# EAGLE board 5volt (EAGLE 9.6.2)
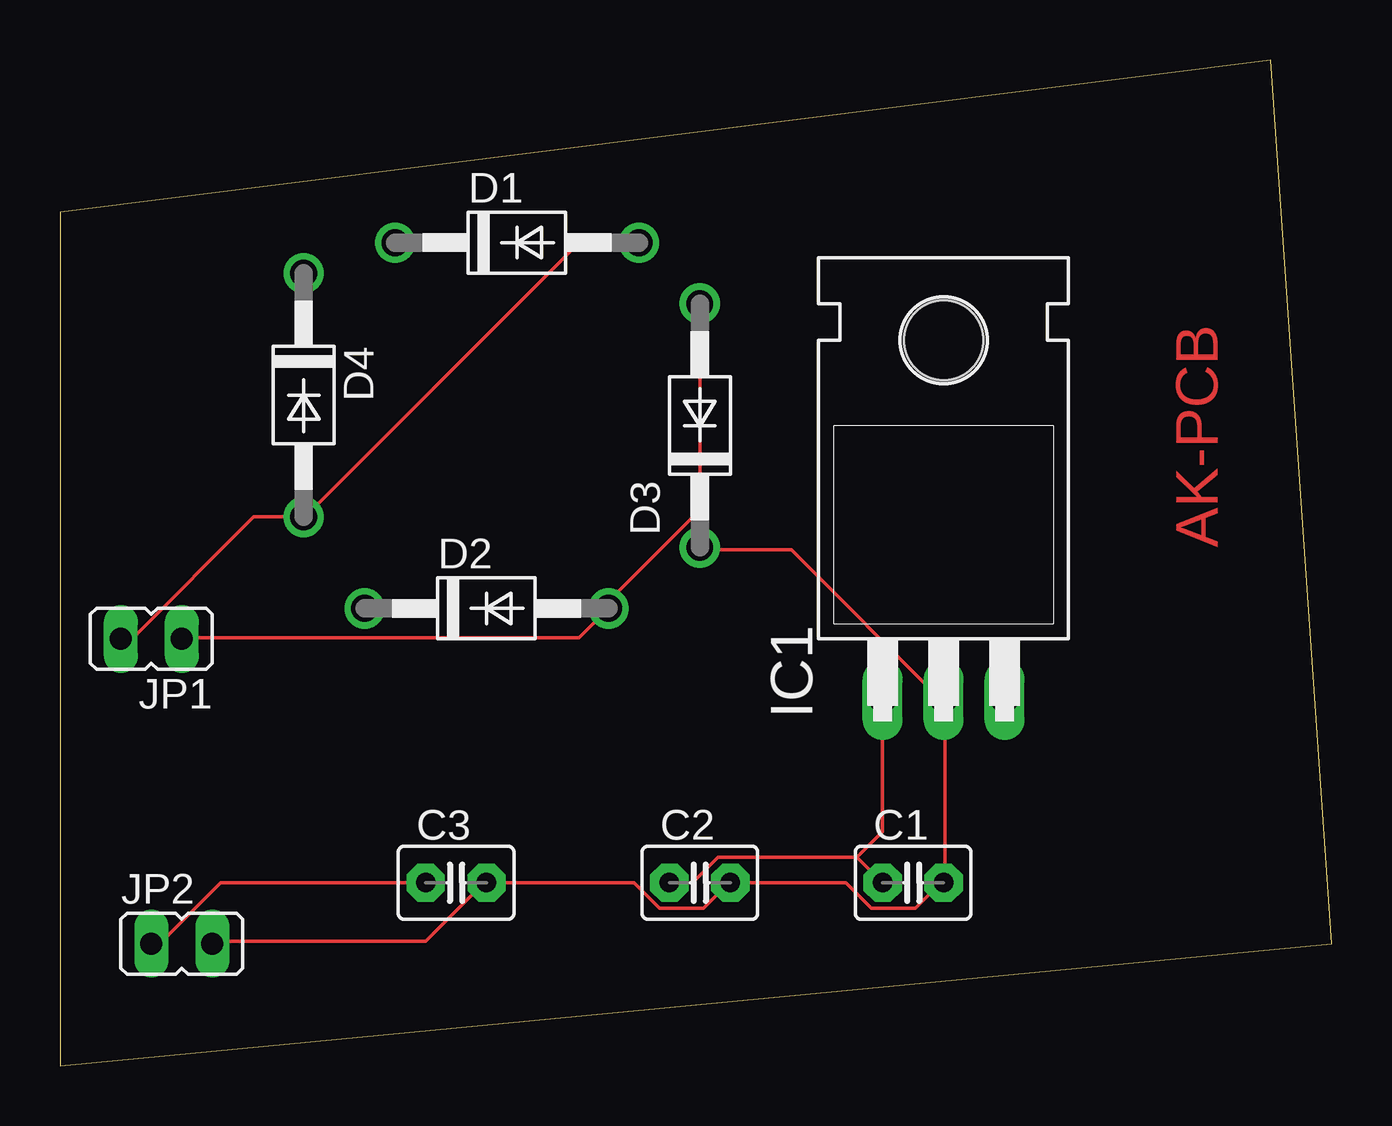
[diagram p0: board, top side]
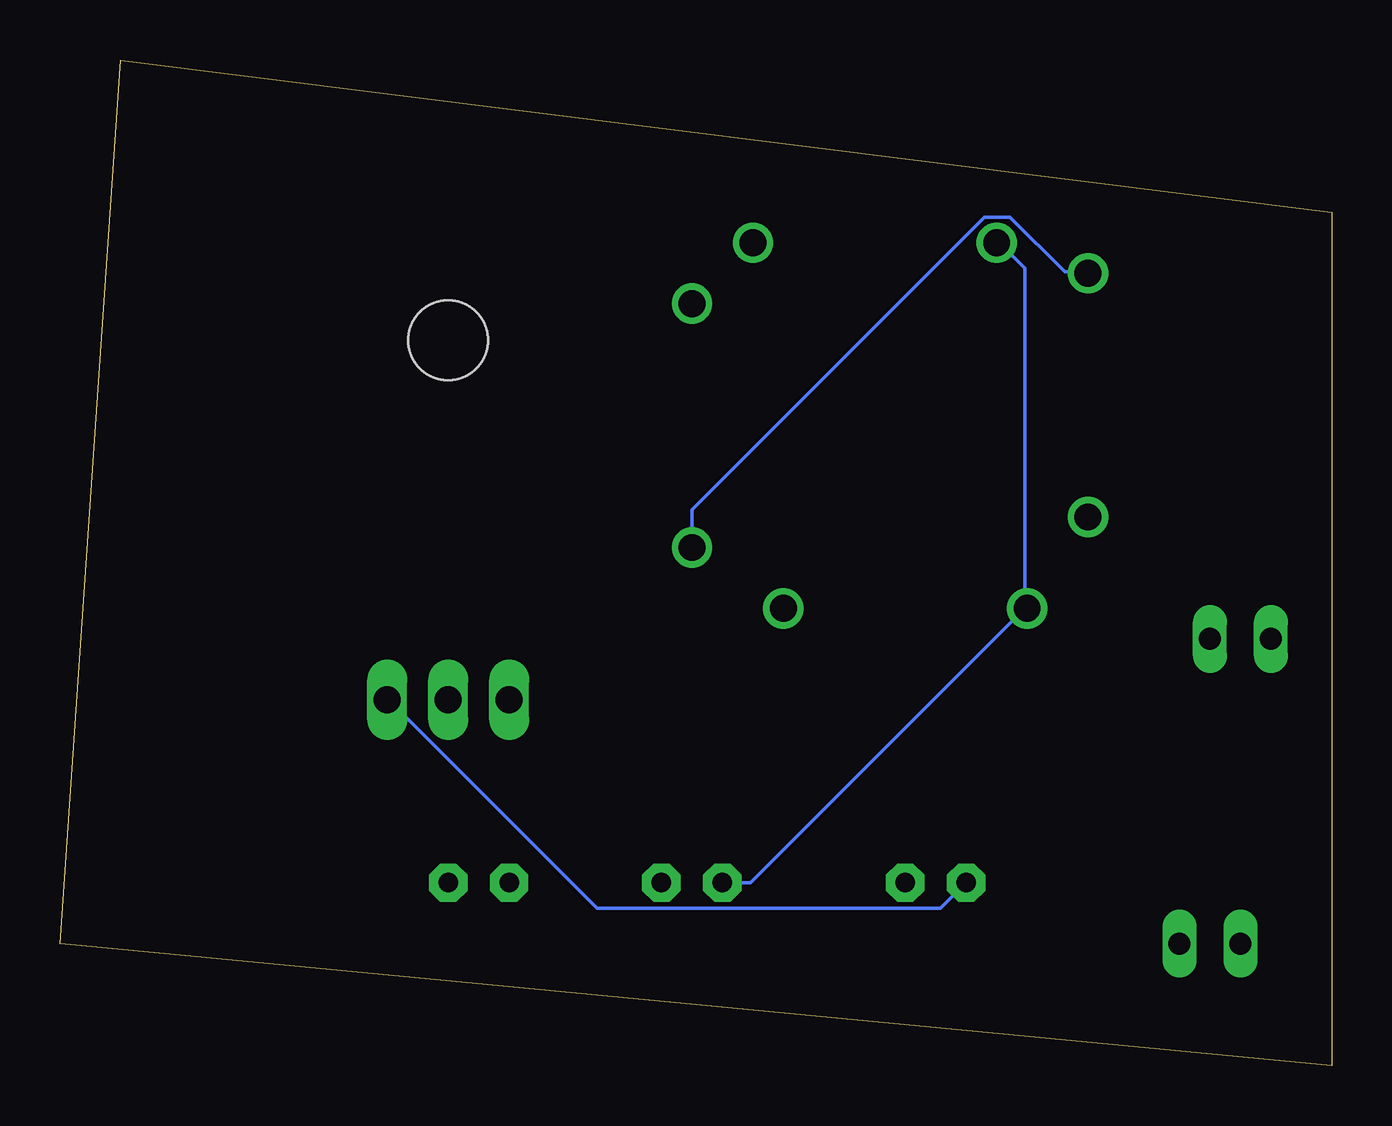
[diagram p1: board, bottom side, seen from below]

Size 53.01 x 41.9 mm. Coordinates in mm from the lower left corner, seen from the top.
Outline: 0,0 53.01,5.08 50.47,41.9 0,35.55 0,0
Copper layers (1*16): Top 0.035mm / dielectric 1.5mm / Bottom 0.035mm
Design rules "default": minimum track width 6mil, minimum drill 0.35mm, track to track 6mil, track to pad 6mil, pad to pad 6mil, via to via 6mil, smd to smd 6mil, copper to edge 40mil, drill to drill 6mil, minimum pad ring 10mil, minimum via ring 8mil, stop-mask expansion 4mil, vias tented up to drill 0mil, thermal gap 10mil
Holes 0.35 mm at -40.64,55.88

## Footprints (pad centres in the part's own frame; a part is rotated, then mirrored left to right if it is on the bottom)
C2.5-3 = drill 0.813 pad 1.6 octagon: 1 -1.27,0; 2 1.27,0
DO41-10 = drill 1.118: A 5.08,0; C -5.08,0
TO220H = drill 1.118 long: 1 -2.54,-10.16; 2 0,-10.16; 3 2.54,-10.16 | hole 3.302: 0,4.826
JP1 = drill 0.914 long: 1 0,-1.27; 2 0,1.27

## Placement (x,y rotation side)
C1  10  [C2.5-3]  35.56,7.62 0 top
C2  10  [C2.5-3]  26.67,7.62 0 top
C3  10  [C2.5-3]  16.51,7.62 0 top
D1  1N4004  [DO41-10]  19.05,34.29 0 top
D2  1N4004  [DO41-10]  17.78,19.05 0 top
D3  1N4004  [DO41-10]  26.67,26.67 90 top
D4  1N4004  [DO41-10]  10.16,27.94 270 top
IC1  7805T  [TO220H]  36.83,25.4 0 top
JP1  12v  [JP1]  3.81,17.78 90 top
JP2  5v  [JP1]  5.08,5.08 270 top

## Library data of the parts
C1-C3 = capacitor-wima
D1-D4 = diode
IC1 = linear
JP1 JP2 = jumper

## Nets
GND: C1.2 C2.2 C3.2 D3.C D4.C IC1.2 JP2.2
N$1: D1.A D4.A JP1.2
N$2: C1.1 C2.1 D1.C D2.C IC1.1
N$3: C3.1 IC1.3 JP2.1
N$5: D2.A D3.A JP1.1

## Tracks (layer width: path | path; a pad name or v marks a point on that pad's centre or on a via)
GND
  Top 0.152: JP2.2 6.4,5.18 15.24,5.18 17.68,7.62 C3.2 23.93,7.62 24.99,6.55 26.82,6.55 27.89,7.62 C2.2 32.77,7.62 33.83,6.55 35.66,6.55 36.73,7.62 C1.2 36.88,7.62 36.88,15.24 IC1.2 36.73,15.24 30.48,21.49 26.67,21.49 D3.C
  Bottom 0.152: D3.C 26.67,23.17 14.48,35.36 13.41,35.36 11.12,33.07 10.21,33.07 D4.C
N$1
  Top 0.152: JP1.2 2.59,17.83 3.05,17.83 8.08,22.86 D4.A 10.21,22.86 21.64,34.29 D1.A
N$2
  Top 0.152: C2.1 26.36,7.62 27.43,8.69 33.22,8.69 | C1.1 33.22,8.69 | IC1.1 34.29,9.75 33.22,8.69
  Bottom 0.152: 12.8,19.05 12.8,33.22 13.87,34.29 D1.C | C2.1 24.23,7.62 12.8,19.05 | 12.8,19.05 D2.C
N$3
  Top 0.152: C3.1 6.71,7.62 4.27,5.18 3.81,5.18 JP2.1
  Bottom 0.152: C3.1 16.31,6.55 30.63,6.55 39.32,15.24 IC1.3
N$5
  Top 0.152: 26.47,31.95 D3.A 26.67,23.17 22.86,19.36 D2.A 21.64,17.83 5.18,17.83 JP1.1

## Text on the board
Top: AK-PCB